# Altium PCB PCB_2020-08-04_13-41-21_2020-08-21_13-22-36.pcbdoc
Units mil, origin at the board's own origin, x right, y up, seen from the top; angles counter-clockwise.
Board outline 4947.01 x 4947.01 mil, 2 copper layers (Top Layer, Bottom Layer); 45 components, 87 nets, 336 pads, 43 vias.
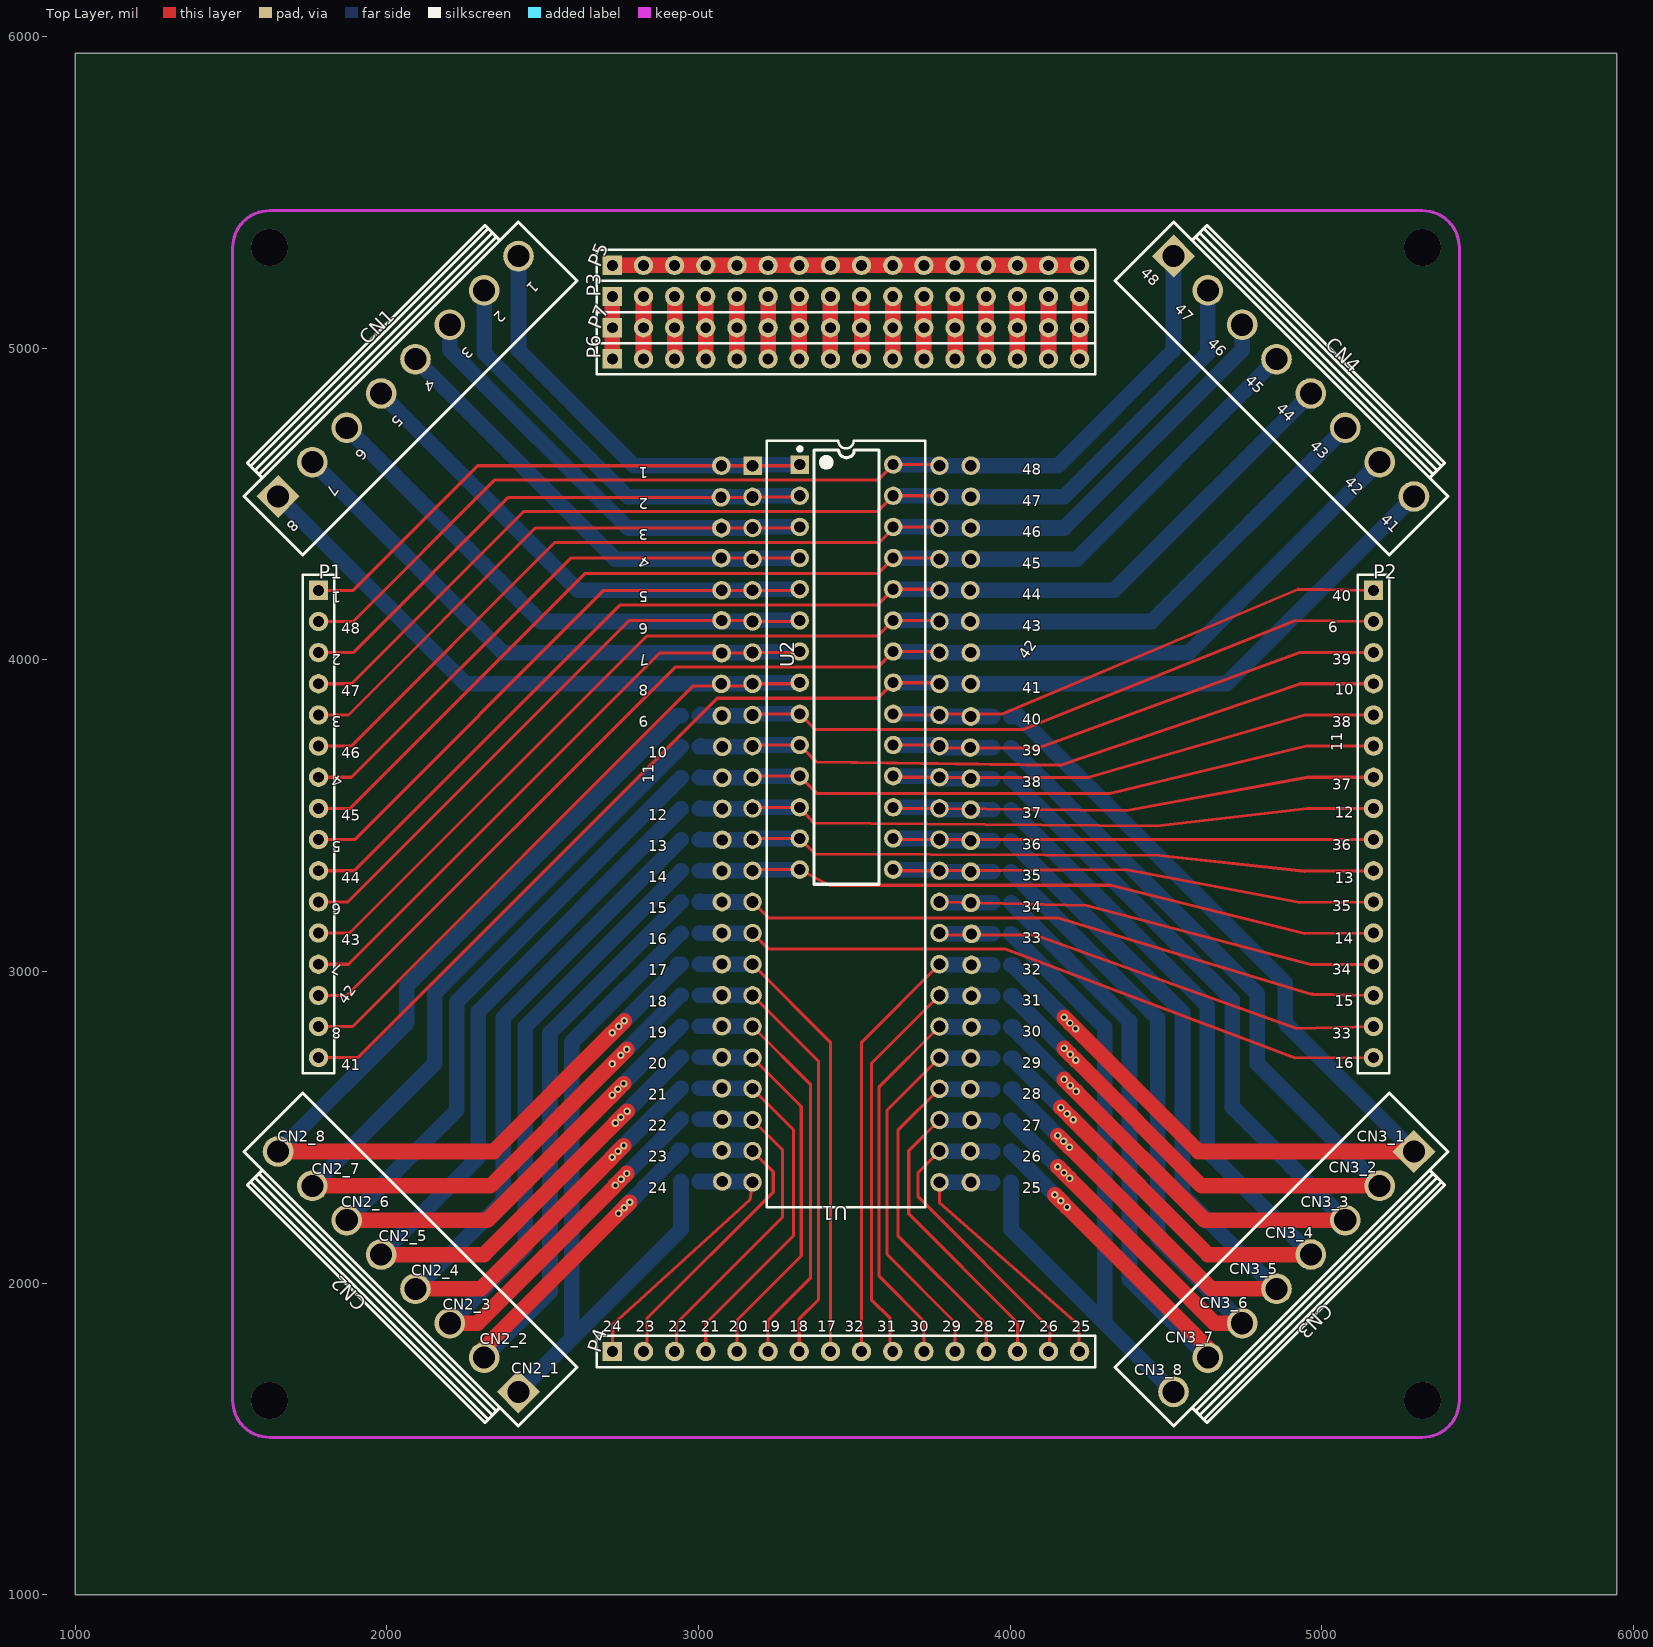
[diagram p0: Top Layer view]
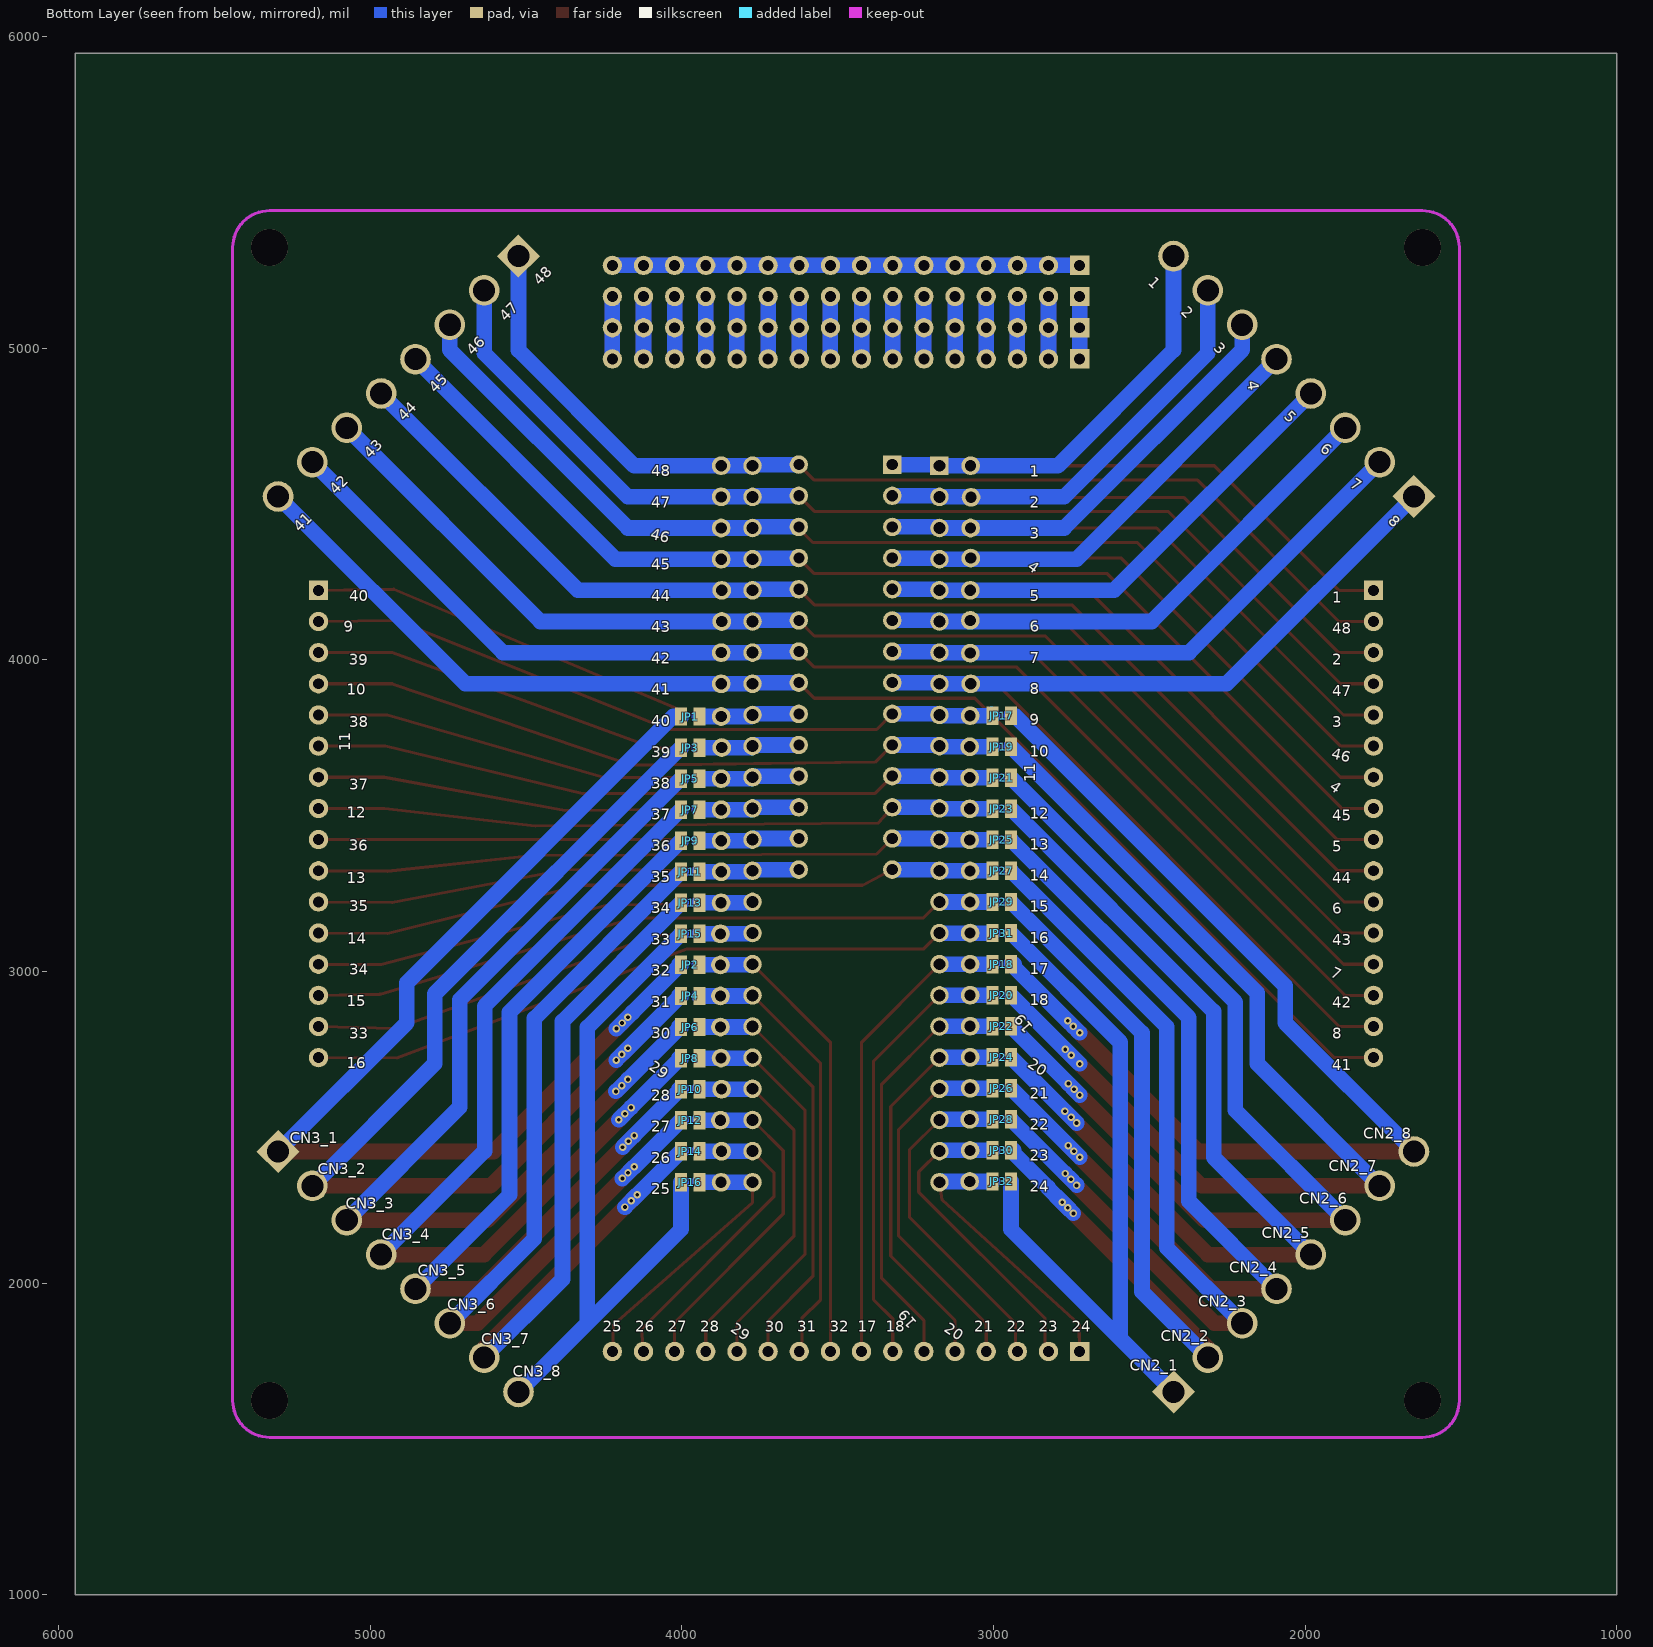
[diagram p1: Bottom Layer view, seen from below]

## Layer stack, top to bottom
Top Layer: signal copper (thickness not stored)
Dielectric: dielectric 12.6, FR-4, Dk 4.8
Bottom Layer: signal copper (thickness not stored)

## Board outline
5947.01,1000 1000,1000 1000,5947.01 5947.01,5947.01

## Components (designator, comment, footprint, x,y, rotation, side; value= is the part's Value field where it differs from the comment)
CN1 "B8P-VH (LF)(SN)" "CONN-TH_B8P-VH (LF)(SN)" 2036.5,4910.51 r45 top
CN2 "B8P-VH (LF)(SN)" "CONN-TH_B8P-VH (LF)(SN)" 2036.5,2036.5 r135 top
CN3 "B8P-VH (LF)(SN)" "CONN-TH_B8P-VH (LF)(SN)" 4910.51,2036.5 r225 top
CN4 "B8P-VH (LF)(SN)" "CONN-TH_B8P-VH (LF)(SN)" 4910.51,4910.51 r315 top
JP1 "Jumper pad" JUMPERPADS 3973.5,3818.5 r180 bottom
JP2 "Jumper pad" JUMPERPADS 3973.5,3021.17 r180 bottom
JP3 "Jumper pad" JUMPERPADS 3973.5,3718.84 r180 bottom
JP4 "Jumper pad" JUMPERPADS 3973.5,2921.5 r180 bottom
JP5 "Jumper pad" JUMPERPADS 3973.5,3619.17 r180 bottom
JP6 "Jumper pad" JUMPERPADS 3973.5,2821.84 r180 bottom
JP7 "Jumper pad" JUMPERPADS 3973.5,3519.5 r0 bottom
JP8 "Jumper pad" JUMPERPADS 3973.5,2722.17 r0 bottom
JP9 "Jumper pad" JUMPERPADS 3973.5,3419.84 r0 bottom
JP10 "Jumper pad" JUMPERPADS 3973.5,2622.5 r0 bottom
JP11 "Jumper pad" JUMPERPADS 3973.5,3320.17 r0 bottom
JP12 "Jumper pad" JUMPERPADS 3973.5,2522.84 r0 bottom
JP13 "Jumper pad" JUMPERPADS 3973.5,3220.5 r0 bottom
JP14 "Jumper pad" JUMPERPADS 3973.5,2423.17 r0 bottom
JP15 "Jumper pad" JUMPERPADS 3973.5,3120.84 r0 bottom
JP16 "Jumper pad" JUMPERPADS 3973.5,2323.5 r0 bottom
JP17 "Jumper pad" JUMPERPADS 2973.5,3821.17 r180 bottom
JP18 "Jumper pad" JUMPERPADS 2973.5,3023.84 r180 bottom
JP19 "Jumper pad" JUMPERPADS 2973.5,3721.5 r180 bottom
JP20 "Jumper pad" JUMPERPADS 2973.5,2924.17 r180 bottom
JP21 "Jumper pad" JUMPERPADS 2973.5,3621.84 r180 bottom
JP22 "Jumper pad" JUMPERPADS 2973.5,2824.5 r180 bottom
JP23 "Jumper pad" JUMPERPADS 2973.5,3522.17 r180 bottom
JP24 "Jumper pad" JUMPERPADS 2973.5,2724.84 r180 bottom
JP25 "Jumper pad" JUMPERPADS 2973.5,3422.5 r180 bottom
JP26 "Jumper pad" JUMPERPADS 2973.5,2625.17 r180 bottom
JP27 "Jumper pad" JUMPERPADS 2973.5,3322.84 r0 bottom
JP28 "Jumper pad" JUMPERPADS 2973.5,2525.5 r0 bottom
JP29 "Jumper pad" JUMPERPADS 2973.5,3223.17 r0 bottom
JP30 "Jumper pad" JUMPERPADS 2973.5,2425.84 r0 bottom
JP31 "Jumper pad" JUMPERPADS 2973.5,3123.5 r0 bottom
JP32 "Jumper pad" JUMPERPADS 2973.5,2326.17 r0 bottom
P1 "Header-Female-2.54_1x16" HDR-TH_16P-P2.54-V 1780.59,3473.5 r0 top
P2 "Header-Female-2.54_1x16" HDR-TH_16P-P2.54-V 5166.42,3473.5 r0 top
P3 "Header-Female-2.54_1x16" HDR-TH_16P-P2.54-V 3473.5,5166.42 r90 top
P4 "Header-Female-2.54_1x16" HDR-TH_16P-P2.54-V 3473.5,1780.59 r90 top
P5 "Header-Female-2.54_1x16" HDR-TH_16P-P2.54-V 3473.5,5266.42 r90 top
P6 "Header-Female-2.54_1x16" HDR-TH_16P-P2.54-V 3473.5,4966.42 r90 top
P7 "Header-Female-2.54_1x16" HDR-TH_16P-P2.54-V 3473.5,5066.42 r90 top
U1 "DIP48" DIP48 3473.5,3473.5 r180 top
U2 "DIP28" DIP-28_300MIL 3625,3327.01 r90 top

## Footprints (in the part's own frame and the unit in brackets; to place one, negate y for a bottom-side part, rotate by r counter-clockwise, add the part's x,y. Pads: shape width x height; smd on the part's side, far side on the other; paste and mask are expansions set on the pad)
"CONN-TH_B8P-VH (LF)(SN)" [mm]
  rect 2.5x2.5 hole 1.8: 1(-13.86,0)
  round 2.5 hole 1.8: 2(-9.9,0) 3(-5.94,0) 4(-1.98,0) 5(1.98,0) 6(5.94,0) 7(9.9,0) 8(13.86,0)
  silkscreen extent -15.81,-4.8 15.81,3.7
DIP48 [mil]
  rect 59.5x59.5 hole 38: 1(300,-1150)
  round 59.5 hole 38: 2(300,-1050) 3(300,-950) 4(300,-850) 5(300,-750) 6(300,-650) 7(300,-550) 8(300,-450) 9(300,-350) 10(300,-250) 11(300,-150) 12(300,-50) 13(300,50) 14(300,150) 15(300,250) 16(300,350) 17(300,450) 18(300,550) 19(300,650) 20(300,750) 21(300,850) 22(300,950) 23(300,1050) 24(300,1150) 25(-300,1150) 26(-300,1050) 27(-300,950) 28(-300,850) 29(-300,750) 30(-300,650) 31(-300,550) 32(-300,450) 33(-300,350) 34(-300,250) 35(-300,150) 36(-300,50) 37(-300,-50) 38(-300,-150) 39(-300,-250) 40(-300,-350) 41(-300,-450) 42(-300,-550) 43(-300,-650) 44(-300,-750) 45(-300,-850) 46(-300,-950) 47(-300,-1050) 48(-300,-1150)
  silkscreen extent -254,-1230 254,1230
DIP-28_300MIL [mm]
  rect 1.5x1.5 hole 0.9: 1(33.02,7.62)
  round 1.5 hole 0.9: 2(30.48,7.62) 3(27.94,7.62) 4(25.4,7.62) 5(22.86,7.62) 6(20.32,7.62) 7(17.78,7.62) 8(15.24,7.62) 9(12.7,7.62) 10(10.16,7.62) 11(7.62,7.62) 12(5.08,7.62) 13(2.54,7.62) 14(0,7.62) 15(0,0) 16(2.54,0) 17(5.08,0) 18(7.62,0) 19(10.16,0) 20(12.7,0) 21(15.24,0) 22(17.78,0) 23(20.32,0) 24(22.86,0) 25(25.4,0) 26(27.94,0) 27(30.48,0) 28(33.02,0)
  silkscreen extent -1.19,1.16 34.45,7.76
HDR-TH_16P-P2.54-V [mil]
  rect 62x62 hole 35: 1(0,750)
  round 62 hole 35: 2(0,650) 3(0,550) 4(0,450) 5(0,350) 6(0,250) 7(0,150) 8(0,50) 9(0,-50) 10(0,-150) 11(0,-250) 12(0,-350) 13(0,-450) 14(0,-550) 15(0,-650) 16(0,-750)
  silkscreen extent -50,-800 50,800
JUMPERPADS [mm]
  rect 1x1.5 smd: 1(0.75,0) 2(-0.75,0)

## Free pads (board coordinates)
  round 60 hole 36: 14(3072.14,4522.01) 15(3073.5,4623.51) 16(3073.48,4423.51) 17(3073.18,4327.01) 18(3074.46,4223.51) 19(3074.46,4127.01) 20(3074.46,4022.01) 21(3073.12,3923.51) 22(3075.15,3821.17) 23(3076.48,3721.51) 24(3076.48,3621.84) 25(3076.48,3522.17) 26(3076.48,3422.51) 27(3075.15,3322.84) 28(3075.15,3223.17) 29(3075.15,3123.51) 30(3075.15,3023.84) 31(3075.15,2924.17) 32(3075.15,2824.51) 33(3075.15,2724.84) 34(3075.15,2625.17) 35(3076.48,2525.51) 36(3075.15,2425.84) 37(3076.48,2326.17) 38(3874.23,4523.51) 39(3874.23,4423.51) 40(3874.23,4623.51) 41(3874.23,4323.51) 42(3872.38,4223.51) 43(3872.38,4123.51) 44(3874.23,4023.51) 45(3874.23,3923.51) 46(3874.23,3818.51) 47(3872.38,3718.84) 48(3874.23,3619.17) 49(3874.23,3519.51) 50(3874.23,3419.84) 51(3874.23,3320.17) 52(3874.53,3220.51) 53(3876.38,3120.84) 54(3876.38,3021.17) 55(3876.38,2921.51) 56(3876.38,2821.84) 57(3874.53,2722.17) 58(3872.68,2622.51) 59(3876.38,2522.84) 60(3872.68,2423.17) 61(3874.53,2323.51)
  round 118.11 hole 118.11 unplated: ""(1623.11,1623.11) ""(1623.11,5323.9) ""(5323.9,1623.11) ""(5323.9,5323.9)

## Via types
v1: diameter 24, hole 12, Top Layer to Bottom Layer, 43 vias

## Nets (pads, with @x,y where several pads share a name; then routed paths per layer and width w, separated by ;. In a path a pad name is that pad's centre, name@x,y a point inside that pad or via, vN(x,y) a via of type N, cw(c..) or ccw(c..) an arc to the next point about the centre after c; other vN are vias at no path point)
CN2_1: CN2.1 JP31.2 JP32.2 | length 2580.5
  Bottom Layer w50: JP32.2 2943.97,2172.27 2422.35,1650.65 2593.5,1821.8 2593.5,2773.01 JP31.2
CN2_2: CN2.2 JP29.2 JP30.2 | length 2709.9
  Top Layer w50: CN2.2 2312.1,1792.11 v1(2743.5,2223.51) v1(2779.62,2259.63)
  Bottom Layer w50: CN2.2 2523.5,1972.3 2523.5,2802.71 JP29.2 ; v1(2743.5,2223.51) v1(2761.87,2241.88) v1(2779.62,2259.63) 2825,2305.01 2825,2306.87 JP30.2 JP30.2@2935.84,2425.84
CN2_3: CN2.3 JP27.2 JP28.2 | length 2826.6
  Top Layer w50: CN2.3 2291.13,1871.14 v1(2733.5,2313.51) 2733.5,2315.04 v1(2770.2,2351.74)
  Bottom Layer w50: CN2.3@2201.85,1871.14 2443.5,2112.79 2443.5,2822.41 JP27.2 ; v1(2733.5,2313.51) 2733.5,2315.04 v1(2751.7,2333.24) v1(2770.2,2351.74) JP28.2
CN2_4: CN2.4 JP25.1 JP26.1 | length 2966.9
  Top Layer w50: CN2.4 2301.37,1981.38 v1(2723.5,2403.51) 2723.5,2404.7 v1(2760.12,2441.32)
  Bottom Layer w50: CN2.4 2373.5,2263.26 2373.5,2852.01 JP25.1 ; v1(2723.5,2403.51) 2723.5,2404.7 v1(2741.87,2423.07) v1(2760.12,2441.32) JP26.1
CN2_5: CN2.5 JP23.1 JP24.1 | length 3107.4
  Top Layer w50: CN2.5 2311.61,2091.62 v1(2733.5,2513.51) ; v1(2733.5,2514.37) v1(2770.78,2551.65)
  Bottom Layer w50: CN2.5 2293.5,2403.74 2293.5,2871.71 JP23.1 ; v1(2733.5,2513.51) v1(2733.5,2514.37) 2751.28,2532.15 v1(2770.78,2551.65) JP24.1
  other v1: 2751.28,2532.15
CN2_6: CN2.6 JP21.1 JP22.1 | length 3247
  Top Layer w50: CN2.6 2321.85,2201.86 v1(2723.5,2603.51) v1(2759.7,2640.24)
  Bottom Layer w50: CN2.6 2223.5,2554.23 2223.5,2901.41 JP21.1 ; v1(2723.5,2603.51) 2723.5,2604.04 v1(2741.45,2621.99) v1(2759.7,2640.24) JP22.1
CN2_7: CN2.7 JP19.1 JP20.1 | length 3402
  Top Layer w50: CN2.7 2332.09,2312.1 v1(2723.5,2703.51) v1(2769.87,2750.07)
  Bottom Layer w50: CN2.7 2153.5,2704.71 2153.5,2931.01 JP19.1 ; v1(2723.5,2703.51) 2723.5,2703.7 v1(2750.87,2731.07) v1(2769.87,2750.07) JP20.1
CN2_8: CN2.8 JP17.1 JP18.1 | length 3548.7
  Top Layer w50: CN2.8 2342.34,2422.34 v1(2723.5,2803.51) v1(2761.78,2841.65)
  Bottom Layer w50: CN2.8 2063.5,2835.19 2063.5,2953.5 2931.17,3821.17 JP17.1 ; v1(2723.5,2803.51) 2723.64,2803.51 2743.78,2823.65 2761.78,2841.65 JP18.1 JP18.1@2933.84,3023.84
  other v1: 2743.78,2823.65
CN3_1: CN3.1 JP1.2 JP2.2 | length 3599.9
  Top Layer w50: v1(4173.5,2853.51) v1(4192.24,2834.77) v1(4210.24,2816.77) 4604.66,2422.35 CN3.1
  Bottom Layer w50: JP1.2 4028.5,3818.51 ; JP1.2 4028.5,3818.5 ; JP2.2@4010.84,3021.17 JP2.2 4005.84,3021.17 v1(4173.5,2853.51) ; 4154.75,2872.26 v1(4173.5,2853.51) ; v1(4210.24,2816.77) v1(4173.5,2853.51) ; CN3.1 4883.5,2835.2 4883.5,2963.5 4028.5,3818.5
CN3_2: CN3.2 JP3.2 JP4.2 | length 3393.1
  Top Layer w50: v1(4173.5,2753.51) 4192.96,2734.05 v1(4211.21,2715.8) 4614.91,2312.1 CN3.2
  Bottom Layer w50: JP3.2 4793.5,2928.41 4793.5,2704.71 CN3.2 ; JP4.2@4010.51,2921.5 JP4.2 4005.5,2921.51 v1(4173.5,2753.51) v1(4211.21,2715.8)
  other v1: 4192.96,2734.05
CN3_3: CN3.3 JP5.2 JP6.2 | length 3252.9
  Top Layer w50: v1(4173.5,2653.51) 4192.96,2634.05 4211.96,2615.05 4625.16,2201.85 CN3.3@5075.87,2201.85
  Bottom Layer w50: JP5.2 4713.5,2908.71 4713.5,2564.22 CN3.3@5075.87,2201.85 ; JP6.2@4010.17,2821.84 JP6.2 4005.17,2821.84 v1(4173.5,2653.51) v1@4211.96,2615.05
  other v1: 4211.96,2615.05 4192.96,2634.05
CN3_4: CN3.4 JP7.1 JP8.1 | length 3112.7
  Top Layer w50: v1(4163.5,2563.51) v1(4183.21,2543.8) v1(4202.71,2524.3) 4635.39,2091.62 CN3.4
  Bottom Layer w50: JP7.1 4633.5,2889.01 4633.5,2423.75 CN3.4 ; JP8.1@4009.84,2722.17 JP8.1 4004.84,2722.17 v1(4163.5,2563.51) v1(4202.71,2524.3)
CN3_5: CN3.5 JP9.1 JP10.1 | length 2968.5
  Top Layer w50: v1(4153.5,2473.51) v1(4171.71,2455.3) v1(4190.71,2436.3) 4645.63,1981.38 CN3.5
  Bottom Layer w50: JP9.1 4553.5,2869.41 4553.5,2283.27 CN3.5 ; JP10.1@4009.51,2622.5 JP10.1 4004.5,2622.51 v1(4153.5,2473.51) v1(4190.71,2436.3)
CN3_6: CN3.6 JP11.1 JP12.1 | length 2821.9
  Top Layer w50: v1(4153.5,2373.51) v1(4173.21,2353.8) v1(4191.21,2335.8) 4655.88,1871.13 CN3.6@4745.15,1871.13
  Bottom Layer w50: JP11.1 4473.5,2849.71 4473.5,2142.78 CN3.6@4745.15,1871.13 ; JP12.1 4152.36,2373.51 v1(4153.5,2373.51) v1(4191.21,2335.8)
CN3_7: CN3.7 JP13.1 JP14.1 | length 2701.6
  Top Layer w50: v1(4143.5,2283.51) 4162.96,2264.05 4182.96,2244.05 4634.91,1792.1 CN3.7
  Bottom Layer w50: JP13.1 4383.5,2840.01 4383.5,2012.31 CN3.7 ; JP14.1 4142.69,2283.51 v1(4143.5,2283.51) v1@4182.96,2244.05
  other v1: 4182.96,2244.05 4162.96,2264.05
CN3_8: CN3.8 JP15.1 JP16.1 | length 2575.3
  Bottom Layer w50: JP16.1 4003,2172.31 CN3.8 ; JP15.1 4303.5,2820.41 4303.5,1871.82 CN3.8
L1: CN1.8 P1.1 pad.15 U1.1 U2.1 | length 3071.1
  Top Layer w10: P1.1 1891.5,4223.51 2291.5,4623.51 pad.15 U1.1 3321.5,4623.5 U2.1
  Bottom Layer w50: CN1.8 2422.3,4994.71 2793.5,4623.51 U1.1 3177,4627.01 U2.1
L2: CN1.7 P1.3 pad.14 U1.2 U2.2 | length 3159.6
  Top Layer w10: P1.3 1891.5,4023.51 2390,4522.01 pad.14 3172,4522.01 U1.2 3321.5,4523.5 U2.2
  Bottom Layer w50: CN1.7 2312.1,4984.91 2773.5,4523.51 U1.2 3177,4527.01 U2.2
L3: CN1.6 P1.5 pad.16 U1.3 U2.3 | length 3236.5
  Top Layer w10: P1.5 1876.5,3823.51 2476.5,4423.51 pad.16 U1.3 3321.5,4423.51 U2.3
  Bottom Layer w50: CN1.6 2201.9,4995.11 2773.5,4423.51 U1.3 3177,4427.01 U2.3
L4: CN1.5 P1.7 pad.17 U1.4 U2.4 | length 3341.6
  Top Layer w10: P1.7 1886.5,3623.5 2590,4327.01 U1.4@3170,4327.01 ; U1.4 U1.4@3170,4327.01 ; U2.4 U1.4@3170,4327.01
  Bottom Layer w50: CN1.5 2733.74,4323.51 U1.4 3177,4327.01 U2.4
L5: CN1.4 P1.9 pad.18 U1.5 U2.5 | length 3484
  Top Layer w10: P1.9 1896.5,3423.51 2696.5,4223.51 pad.18 U1.5 3321.5,4223.5 U2.5
  Bottom Layer w50: CN1.4 2613.26,4223.51 U1.5 3177,4227.01 U2.5
L6: CN1.3 P1.11 pad.19 U1.6 U2.6 | length 3634.3
  Top Layer w10: P1.11 1875,3223.51 2778.5,4127.01 3170,4127.01 U1.6 3321.5,4123.5 U2.6
  Bottom Layer w50: CN1.3 2492.79,4123.51 U1.6 3177,4127.01 U2.6
L7: CN1.2 P1.13 pad.20 U1.7 U2.7 | length 3778.9
  Top Layer w10: P1.13 1876.5,3023.51 2875,4022.01 3172,4022.01 U1.7 3321.5,4023.5 U2.7
  Bottom Layer w50: CN1.2 2372.29,4023.51 U1.7 3177,4027.01 U2.7
L8: CN1.1 P1.15 pad.21 U1.8 U2.8 | length 3926.3
  Top Layer w10: P1.15 1890,2823.51 2983.5,3917.01 3167,3917.01 U1.8 3321.5,3923.5 U2.8
  Bottom Layer w50: CN1.1 2251.81,3923.51 pad.21 U1.8 3177,3927.01 U2.8
L9: JP17.2 P2.2 pad.22 U1.9 U2.9 | length 2412.5
  Top Layer w10: U1.9 3177.01,3827.01 U2.9 3375,3777.01 4042.5,3777.01 4915,4127.01 P2.2
  Bottom Layer w50: JP17.2@3006.87,3825 JP17.2 pad.22 3171.16,3821.17 U1.9 3177,3827.01 U2.9
L10: JP19.2 P2.4 pad.23 U1.10 U2.10 | length 2389.6
  Top Layer w10: U1.10 3177.01,3727.01 U2.10 3380,3672.01 4160,3662.01 4930,3923.5 P2.4
  Bottom Layer w50: JP19.2@3006.54,3725 JP19.2 pad.23 3171.5,3721.51 U1.10 3177,3727.01 U2.10
L11: JP21.2 P2.6 pad.24 U1.11 U2.11 | length 2363.6
  Top Layer w10: U1.11 3177.01,3627.01 U2.11 3380,3572.01 4320,3572.01 4951.5,3723.51 P2.6
  Bottom Layer w50: JP21.2@3006.2,3625 JP21.2 pad.24 3171.83,3621.84 U1.11 3177,3627.01 U2.11
L12: JP23.2 P2.8 pad.25 U1.12 U2.12 | length 2347.9
  Top Layer w10: U1.12 3177.01,3527.01 U2.12 3370,3477.01 4470,3467.01 4955,3523.5 P2.8
  Bottom Layer w50: JP23.2@3005.87,3525 JP23.2 pad.25 3172.16,3522.17 U1.12 3177,3527.01 U2.12
L13: JP25.2 P2.10 pad.26 U1.13 U2.13 | length 2345.1
  Top Layer w10: U1.13 3177.01,3427.01 U2.13 3375,3377.01 4480,3372.01 4945,3322.01 P2.10
  Bottom Layer w50: JP25.2@3005.53,3425 JP25.2 pad.26 3172.5,3422.51 U1.13 3177,3427.01 U2.13
L14: JP27.1 P2.12 pad.27 U1.14 U2.14 | length 2352.4
  Top Layer w10: U1.14 3177.01,3327.01 U2.14 3420,3277.01 4320,3277.01 4945,3122.01 P2.12
  Bottom Layer w50: JP27.1@3005.2,3325 JP27.1 pad.27 3172.83,3322.84 U1.14 3177,3327.01 U2.14
L15: JP29.1 P2.14 pad.28 U1.15 | length 2223.5
  Top Layer w10: U1.15 3225,3172.01 4155,3172.01 4970,2927.01 P2.14
  Bottom Layer w50: JP29.1@3004.87,3225 JP29.1 pad.28 3173.16,3223.17 U1.15
L16: JP31.1 P2.16 pad.29 U1.16 | length 2250.5
  Top Layer w10: U1.16 3225,3072.01 3985,3072.01 4915,2722.01 P2.16
  Bottom Layer w50: JP31.1@3004.53,3125 JP31.1 pad.29 U1.16
L17: JP18.2 P4.8 pad.30 U1.17 | length 1518.7
  Top Layer w10: U1.17 3423.5,2773.5 P4.8
  Bottom Layer w50: JP18.2@3004.2,3025 JP18.2 pad.30 3173.17,3023.84 U1.17
L18: JP20.2 P4.7 pad.31 U1.18 | length 1426.7
  Top Layer w10: U1.18 3385,2712.01 3385,1947.01 3323.5,1885.51 P4.7
  Bottom Layer w50: JP20.2 pad.31 3172.84,2924.17 U1.18
L19: JP22.2 P4.6 pad.32 U1.19 | length 1347.6
  Top Layer w10: U1.19 3360,2637.01 3360,2017.01 3223.5,1880.51 P4.6
  Bottom Layer w50: JP22.2 pad.32 3172.5,2824.51 U1.19
L20: JP24.2 P4.5 pad.33 U1.20 | length 1264.3
  Top Layer w10: P4.5 3123.5,1880.51 3330,2087.01 3330,2567.01 U1.20
  Bottom Layer w50: JP24.2 pad.33 3172.17,2724.84 U1.20
L21: JP26.2 P4.4 pad.34 U1.21 | length 1185.1
  Top Layer w10: P4.4 3023.5,1870.51 3305,2152.01 3305,2492.01 U1.21
  Bottom Layer w50: JP26.2 pad.34 3171.84,2625.17 U1.21
L22: JP28.1 P4.3 pad.35 U1.22 | length 1097.7
  Top Layer w10: P4.3 2930,1787.11 2930,1872.01 3270,2212.01 3270,2427.01 U1.22
  Bottom Layer w50: JP28.1 pad.35 3171.5,2525.51 U1.22
L23: JP30.1 P4.2 pad.36 U1.23 | length 1014.4
  Top Layer w10: P4.2 2835,1792.11 2835,1887.01 3240,2292.01 3240,2357.01 U1.23
  Bottom Layer w50: JP30.1 pad.36 3171.17,2425.84 U1.23
L24: JP32.1 P4.1 pad.37 U1.24 | length 911.4
  Top Layer w10: P4.1 2725,1867.01 3165,2267.01 U1.24
  Bottom Layer w50: JP32.1@3004.2,2325 JP32.1 pad.37 3170.84,2326.17 U1.24
L25: JP16.2 P4.16 pad.61 U1.25 | length 920.7
  Top Layer w10: U1.25 3773.5,2258.51 4220,1867.01 P4.16
  Bottom Layer w50: U1.25 pad.61 JP16.2 JP16.2@3940.47,2320
L26: JP14.2 P4.15 pad.60 U1.26 | length 1022.7
  Top Layer w10: U1.26 3705,2355 3705,2277.01 4130,1852.01 P4.15
  Bottom Layer w50: U1.26 3773.84,2423.17 pad.60 JP14.2 JP14.2@3940.81,2420
L27: JP12.2 P4.14 pad.59 U1.27 | length 1102.8
  Top Layer w10: U1.27 3675,2425 3675,2222.01 4023.5,1873.51 P4.14
  Bottom Layer w50: U1.27 3774.17,2522.84 pad.59 JP12.2 JP12.2@3941.14,2520
L28: JP10.2 P4.13 pad.58 U1.28 | length 1190
  Top Layer w10: U1.28 3640,2490 3640,2152.01 3923.5,1868.51 P4.13
  Bottom Layer w50: U1.28 3774.5,2622.51 pad.58 JP10.2 JP10.2@3941.47,2620
L29: JP8.2 P4.12 pad.57 U1.29 | length 1277.3
  Top Layer w10: U1.29 3605,2555 3605,2092.01 3823.5,1873.51 P4.12
  Bottom Layer w50: U1.29 3774.84,2722.17 pad.57 JP8.2 JP8.2@3941.8,2720
L30: JP6.1 P4.11 pad.56 U1.30 | length 1356.2
  Top Layer w10: P4.11 3723.5,1878.51 3580,2022.01 3580,2630 U1.30
  Bottom Layer w50: U1.30 3775.17,2821.84 pad.56 JP6.1 JP6.1@3942.14,2820
L31: JP4.1 P4.10 pad.55 U1.31 | length 1435.2
  Top Layer w10: P4.10 3615,1789.1 3615,1887.01 3555,1947.01 3555,2705 U1.31
  Bottom Layer w50: U1.31 3775.5,2921.51 pad.55 JP4.1 JP4.1@3942.47,2920
L32: JP2.1 P4.9 pad.54 U1.32 | length 1519.6
  Top Layer w10: P4.9 3523.5,2773.5 U1.32
  Bottom Layer w50: U1.32 3775.84,3021.17 pad.54 JP2.1 JP2.1@3942.81,3020
L33: JP15.2 P2.15 pad.53 U1.33 | length 1619.2
  Top Layer w10: U1.33 3780,3117.01 4080,3117.01 4920,2817.01 P2.15
  Bottom Layer w50: U1.33 3776.17,3120.84 pad.53 JP15.2
L34: JP13.2 P2.13 pad.52 U1.34 | length 1589.4
  Top Layer w10: U1.34 4245,3212.01 4965,3022.01 P2.13
  Bottom Layer w50: U1.34 3776.5,3220.51 pad.52 JP13.2
L35: JP11.2 P2.11 pad.51 U1.35 U2.15 | length 1874.4
  Top Layer w10: U2.15 3628.5,3323.5 U1.35 4370,3327.01 4930,3222.01 P2.11
  Bottom Layer w50: U2.15 3770,3327.01 U1.35 3776.84,3320.17 pad.51 JP11.2
L36: JP9.2 P2.9 pad.50 U1.36 U2.16 | length 1864.8
  Top Layer w10: U2.16 3628.5,3423.5 U1.36 P2.9
  Bottom Layer w50: U2.16 3770,3427.01 U1.36 3777.17,3419.84 pad.50 JP9.2
L37: JP7.2 P2.7 pad.49 U1.37 U2.17 | length 1874.7
  Top Layer w10: U2.17 3628.5,3523.5 U1.37 4375,3517.01 4955,3623.5 P2.7
  Bottom Layer w50: U2.17 3770,3527.01 U1.37 3777.5,3519.51 pad.49 JP7.2
L38: JP5.1 P2.5 pad.48 U1.38 U2.18 | length 1893.7
  Top Layer w10: U2.18 3628.5,3623.5 U1.38 4250,3622.01 4945,3823.5 P2.5
  Bottom Layer w50: U2.18 3770,3627.01 U1.38 3777.84,3619.17 pad.48 JP5.1
L39: JP3.1 P2.3 pad.47 U1.39 U2.19 | length 1929.6
  Top Layer w10: U2.19 U1.39@3777.01,3727.01 ; U1.39 3773.5,3717.01 4090,3717.01 4930,4023.51 P2.3
  Bottom Layer w50: U2.19 3770,3727.01 U1.39 3778.17,3718.84 pad.47 JP3.1 JP3.1@3942.81,3720
L40: JP1.1 P2.1 pad.46 U1.40 U2.20 | length 1949.7
  Top Layer w10: U2.20 3628.5,3823.5 U1.40 3777.01,3827.01 3975,3827.01 4925,4227.01 P2.1
  Bottom Layer w50: U2.20 3770,3827.01 U1.40 3778.5,3818.51 pad.46 JP1.1 JP1.1@3942.47,3820
L41: CN4.8 P1.16 pad.45 U1.41 U2.21 | length 4414.7
  Top Layer w10: P1.16 1906.5,2723.51 3060,3877.01 3575,3877.01 U2.21 3770,3927.01 U1.41
  Bottom Layer w50: U2.21 3770,3927.01 U1.41 pad.45 4695.2,3923.51 CN4.8
L42: CN4.7 P1.14 pad.44 U1.42 U2.22 | length 4269.3
  Top Layer w10: P1.14 1875,2923.51 1875,2927.01 2925,3977.01 3575,3977.01 U2.22 3770,4027.01 U1.42
  Bottom Layer w50: U2.22 3770,4027.01 U1.42 pad.44 4574.71,4023.51 CN4.7
L43: CN4.6 P1.12 pad.43 U1.43 U2.23 | length 4119.8
  Top Layer w10: P1.12 1880,3123.51 2833.5,4077.01 3575,4077.01 U2.23 3770,4127.01 U1.43
  Bottom Layer w50: U2.23 3770,4127.01 U1.43 pad.43 4454.24,4123.51 CN4.6
L44: CN4.5 P1.10 pad.42 U1.44 U2.24 | length 3972.4
  Top Layer w10: P1.10 1895,3323.51 2748.5,4177.01 3575,4177.01 U2.24 3770,4227.01 U1.44
  Bottom Layer w50: U2.24 3770,4227.01 U1.44 pad.42 4333.75,4223.51 CN4.5
L45: CN4.4 P1.8 pad.41 U1.45 U2.25 | length 3827
  Top Layer w10: P1.8 1885,3523.51 1885,3527.01 2635,4277.01 3575,4277.01 U2.25 3770,4327.01 U1.45
  Bottom Layer w50: U2.25 3770,4327.01 U1.45 pad.41 4213.27,4323.51 CN4.4
L46: CN4.3 P1.6 pad.39 U1.46 U2.26 | length 3727.9
  Top Layer w10: P1.6 1885,3723.51 2538.5,4377.01 3580,4377.01 3625,4422.01 U2.26 3770,4427.01 U1.46
  Bottom Layer w50: U2.26 3770,4427.01 U1.46 pad.39 ; pad.39 4173.5,4423.51 4745.2,4995.21 CN4.3
L47: CN4.2 P1.4 pad.38 U1.47 U2.27 | length 3648
  Top Layer w10: P1.4 1886.5,3923.51 2440,4477.01 3575,4477.01 U2.27 3770,4527.01 U1.47
  Bottom Layer w50: U2.27 3770,4527.01 U1.47 pad.38 ; pad.38 4173.5,4523.51 4634.9,4984.91 CN4.2
L48: CN4.1 P1.2 pad.40 U1.48 U2.28 | length 3561.9
  Top Layer w10: P1.2@1782.09,4122.01 cw(c1782.09,4123.5) P1.2 1891.5,4123.51 2345,4577.01 3575,4577.01 U2.28 3770,4627.01 U1.48
  Bottom Layer w50: U2.28 3770,4627.01 U1.48 pad.40 ; pad.40 4153.5,4623.51 4524.7,4994.71 CN4.1
P3_1: P3.1 P6.1 P7.1 | length 400
  Top Layer w50: P6.1 P3.1
  Bottom Layer w50: P6.1 P7.1 P3.1
P3_2: P3.2 P6.2 P7.2 | length 400
  Top Layer w50: P6.2 P3.2
  Bottom Layer w50: P6.2 P7.2 P3.2
P3_3: P3.3 P6.3 P7.3 | length 400
  Top Layer w50: P6.3 P3.3
  Bottom Layer w50: P6.3 P7.3 P3.3
P3_4: P3.4 P6.4 P7.4 | length 400
  Top Layer w50: P6.4 P3.4
  Bottom Layer w50: P6.4 P7.4 P3.4
P3_5: P3.5 P6.5 P7.5 | length 400
  Top Layer w50: P6.5 P3.5
  Bottom Layer w50: P6.5 P7.5 P3.5
P3_6: P3.6 P6.6 P7.6 | length 400
  Top Layer w50: P6.6 P3.6
  Bottom Layer w50: P6.6 P7.6 P3.6
P3_7: P3.7 P6.7 P7.7 | length 400
  Top Layer w50: P6.7 P3.7
  Bottom Layer w50: P6.7 P7.7 P3.7
P3_8: P3.8 P6.8 P7.8 | length 400
  Top Layer w50: P6.8 P3.8
  Bottom Layer w50: P6.8 P7.8 P3.8
P3_9: P3.9 P6.9 P7.9 | length 400
  Top Layer w50: P6.9 P3.9
  Bottom Layer w50: P6.9 P7.9 P3.9
P3_10: P3.10 P6.10 P7.10 | length 400
  Top Layer w50: P6.10 P3.10
  Bottom Layer w50: P6.10 P7.10 P3.10
P3_11: P3.11 P6.11 P7.11 | length 400
  Top Layer w50: P6.11 P3.11
  Bottom Layer w50: P6.11 P7.11 P3.11
P3_12: P3.12 P6.12 P7.12 | length 400
  Top Layer w50: P6.12 P3.12
  Bottom Layer w50: P6.12 P7.12 P3.12
P3_13: P3.13 P6.13 P7.13 | length 400
  Top Layer w50: P6.13 P3.13
  Bottom Layer w50: P6.13 P7.13 P3.13
P3_14: P3.14 P6.14 P7.14 | length 400
  Top Layer w50: P6.14 P3.14
  Bottom Layer w50: P6.14 P3.14
P3_15: P3.15 P6.15 P7.15 | length 400
  Top Layer w50: P6.15 P3.15
  Bottom Layer w50: P6.15 P3.15
P3_16: P3.16 P6.16 P7.16 | length 400
  Top Layer w50: P6.16 P3.16
  Bottom Layer w50: P6.16 P3.16
P5_1: P5.1 P5.2 P5.3 P5.4 P5.5 P5.6 P5.7 P5.8 P5.9 P5.10 P5.11 P5.12 P5.13 P5.14 P5.15 P5.16 | length 3000
  Top Layer w50: P5.1 P5.2 P5.16
  Bottom Layer w50: P5.1 P5.2 P5.3 P5.4 P5.5 P5.6 P5.7 P5.8 P5.9 P5.10 P5.11 P5.12 P5.13 P5.14 P5.15 P5.16
S$26: 
S$28: 
S$30: 
S$32: 
S$34: 
S$37: 

## Keep-outs
Keep-Out Layer:
  lines w10: 1505,1623.11 ccw(c1623.11,1623.11) 1623.11,1505 ; 1505,5323.9 cw(c1623.11,5323.9) 1623.11,5442.01 ; 5323.9,1505 ccw(c5323.9,1623.11) 5442.01,1623.11 ; 5323.9,5442.01 cw(c5323.9,5323.9) 5442.01,5323.9

## Silkscreen, mask and mechanical layers (free items; w line width, h text height)
Top Overlay:
  text "48" at 4416.13,5239.04 h35 r315
  text "1" at 2466.13,5218.79 h35 r225
  text "2" at 2361.13,5123.79 h35 r225
  text "47" at 4526.13,5124.04 h35 r315
  text "46" at 4631.13,5014.04 h35 r315
  text "3" at 2256.13,5008.79 h35 r225
  text "4" at 2150.76,4898.7 h35 r189
  text "45" at 4751.13,4894.04 h35 r315
  text "44" at 4851.13,4804.04 h35 r315
  text "5" at 2031.13,4788.79 h35 r225
  text "43" at 4961.13,4684.04 h35 r315
  text "6" at 1915.09,4682.67 h35 r230
  text "1" at 2838.5,4618.92 h35 r180
  text "48" at 4038.5,4593.92 h35
  text "42" at 5071.13,4569.04 h35 r315
  text "7" at 1818.99,4566.2 h35 r236
  text "2" at 2838.5,4519.14 h35 r180
  text "47" at 4038.5,4493.7 h35
  text "8" at 1696.13,4453.79 h35 r225
  text "41" at 5186.13,4449.04 h35 r315
  text "3" at 2838.5,4419.35 h35 r180
  text "46" at 4038.5,4393.48 h35
  text "4" at 2848.79,4316.23 h35 r144
  text "45" at 4038.5,4293.27 h35
  text "5" at 2838.5,4219.79 h35 r180
  text "1" at 1853.5,4218.92 h35 r180
  text "44" at 4038.5,4193.05 h35
  text "40" at 5033.5,4188.92 h35
  text "9" at 5049.92,4123.85 h35 r185
  text "6" at 2836.97,4119.94 h35 r185
  text "43" at 4038.5,4092.83 h35
  text "48" at 1853.5,4083.92 h35
  text "7" at 2835.16,4019.9 h35 r191
  text "2" at 1853.5,4018.92 h35 r180
  text "42" at 4052.66,3999.83 h35 r54
  text "39" at 5034.3,3983.92 h35
  text "8" at 2838.5,3920.44 h35 r180
  text "41" at 4038.5,3892.4 h35
  text "10" at 5041.45,3888.92 h35
  text "47" at 1853.5,3883.92 h35
  text "9" at 2836.97,3820.59 h35 r185
  text "3" at 1853.5,3818.92 h35 r180
  text "40" at 4038.5,3792.18 h35
  text "38" at 5034.3,3783.92 h35
  text "11" at 5066.1,3706.42 h35 r90
  text "39" at 4038.5,3691.96 h35
  text "10" at 2838.5,3685.88 h35
  text "46" at 1853.5,3683.92 h35
  text "4" at 1863.79,3615.58 h35 r144
  text "11" at 2856,3603.59 h35 r90
  text "38" at 4038.5,3591.75 h35
  text "37" at 5034.3,3583.92 h35
  text "12" at 5041.45,3493.92 h35
  text "37" at 4038.5,3491.53 h35
  text "12" at 2838.5,3486.31 h35
  text "45" at 1853.5,3483.92 h35
  text "5" at 1853.5,3418.92 h35 r180
  text "36" at 4038.5,3391.31 h35
  text "36" at 5034.3,3388.92 h35
  text "13" at 2838.5,3386.53 h35
  text "35" at 4038.5,3291.09 h35
  text "14" at 2838.5,3286.75 h35
  text "44" at 1853.5,3283.92 h35
  text "13" at 5041.45,3283.92 h35
  text "6" at 1851.97,3218.85 h35 r185
  text "35" at 5034.3,3193.92 h35
  text "34" at 4038.5,3190.88 h35
  text "15" at 2838.5,3186.96 h35
  text "33" at 4038.5,3090.66 h35
  text "14" at 5040.65,3088.92 h35
  text "16" at 2838.5,3087.18 h35
  text "43" at 1853.5,3083.92 h35
  text "7" at 1860.9,3017.28 h35 r155
  text "32" at 4038.5,2990.44 h35
  text "34" at 5033.5,2988.92 h35
  text "17" at 2838.5,2987.4 h35
  text "42" at 1867.66,2891.13 h35 r54
  text "31" at 4038.5,2890.22 h35
  text "15" at 5041.45,2888.92 h35
  text "18" at 2838.5,2887.62 h35
  text "8" at 1853.5,2818.92 h35 r180
  text "30" at 4038.5,2790.01 h35
  text "19" at 2838.5,2787.83 h35
  text "33" at 5034.3,2783.92 h35
  text "29" at 4038.5,2689.79 h35
  text "16" at 5042.25,2688.92 h35
  text "20" at 2838.5,2688.05 h35
  text "41" at 1853.5,2683.92 h35
  text "28" at 4038.5,2589.57 h35
  text "21" at 2838.5,2588.27 h35
  text "27" at 4038.5,2489.35 h35
  text "22" at 2838.5,2488.48 h35
  text "CN2_8" at 1648.5,2453.92 h35
  text "CN3_1" at 5113.5,2453.92 h35
  text "23" at 2838.5,2388.7 h35
  text "26" at 4038.5,2389.14 h35
  text "CN3_2" at 5023.5,2353.92 h35
  text "CN2_7" at 1758.5,2348.92 h35
  text "24" at 2838.5,2288.92 h35
  text "25" at 4038.5,2288.92 h35
  text "CN2_6" at 1853.5,2243.92 h35
  text "CN3_3" at 4933.5,2243.92 h35
  text "CN3_4" at 4818.5,2143.92 h35
  text "CN2_5" at 1973.5,2133.92 h35
  text "CN3_5" at 4703.5,2028.92 h35
  text "CN2_4" at 2078.5,2023.92 h35
  text "CN3_6" at 4608.5,1918.92 h35
  text "CN2_3" at 2178.5,1913.92 h35
  text "24" at 2693.5,1843.92 h35
  text "23" at 2799.14,1843.92 h35
  text "22" at 2903.18,1843.92 h35
  text "21" at 3007.22,1843.92 h35
  text "20" at 3096.96,1843.92 h35
  text "19" at 3201,1843.92 h35
  text "18" at 3290.74,1843.92 h35
  text "17" at 3380.48,1843.92 h35
  text "32" at 3470.22,1843.92 h35
  text "31" at 3574.26,1843.92 h35
  text "30" at 3678.3,1843.92 h35
  text "29" at 3782.34,1843.92 h35
  text "28" at 3886.38,1843.92 h35
  text "27" at 3990.42,1843.92 h35
  text "26" at 4094.46,1843.92 h35
  text "25" at 4198.5,1843.92 h35
  text "CN3_7" at 4498.5,1808.92 h35
  text "CN2_2" at 2298.5,1803.92 h35
  text "CN2_1" at 2398.5,1708.92 h35
  text "CN3_8" at 4398.5,1703.92 h35
Bottom Overlay:
  text "1" at 2505.87,5209.04 h35 r45
  text "48" at 4456.13,5199.04 h35 r315
  text "2" at 2400.87,5114.04 h35 r45
  text "47" at 4566.13,5084.04 h35 r315
  text "3" at 2295.87,4999.04 h35 r45
  text "46" at 4671.13,4974.04 h35 r315
  text "4" at 2185.78,4893.68 h35 r81
  text "45" at 4791.13,4854.04 h35 r315
  text "5" at 2070.87,4779.04 h35 r45
  text "44" at 4891.13,4764.04 h35 r315
  text "6" at 1954.75,4673.01 h35 r40
  text "43" at 5001.13,4644.04 h35 r315
  text "48" at 4098.5,4589.57 h35
  text "1" at 2883.5,4588.05 h35
  text "7" at 1858.29,4556.91 h35 r34
  text "42" at 5111.13,4529.04 h35 r315
  text "47" at 4098.5,4489.35 h35
  text "2" at 2883.5,4488.27 h35
  text "8" at 1735.87,4444.04 h35 r45
  text "41" at 5226.13,4409.04 h35 r315
  text "46" at 4102.73,4389.66 h35 r14
  text "3" at 2883.5,4388.48 h35
  text "4" at 2893.79,4292.04 h35 r36
  text "45" at 4098.5,4288.92 h35
  text "5" at 2883.5,4188.92 h35
  text "44" at 4098.5,4188.7 h35
  text "40" at 5067.7,4188.92 h35
  text "1" at 1913.5,4183.92 h35
  text "6" at 2881.97,4089.2 h35 r355
  text "9" at 5084.12,4088.98 h35 r355
  text "43" at 4098.5,4088.48 h35
  text "48" at 1913.5,4083.92 h35
  text "7" at 2883.5,3989.35 h35
  text "42" at 4098.5,3988.27 h35
  text "2" at 1913.5,3983.92 h35
  text "39" at 5069.11,3983.93 h35 r2
  text "8" at 2883.5,3889.57 h35
  text "10" at 5075.65,3888.92 h35
  text "41" at 4098.5,3888.05 h35
  text "47" at 1913.5,3883.92 h35
  text "9" at 2881.97,3789.85 h35 r355
  text "40" at 4098.5,3787.83 h35
  text "3" at 1913.5,3783.92 h35
  text "38" at 5068.5,3783.92 h35
  text "11" at 5065.3,3706.42 h35 r270
  text "10" at 2883.5,3690.01 h35
  text "39" at 4099.11,3687.62 h35 r2
  text "46" at 1917.73,3684.44 h35 r14
  text "11" at 2866,3607.72 h35 r270
  text "4" at 1923.79,3587.26 h35 r36
  text "38" at 4098.5,3587.4 h35
  text "37" at 5068.5,3583.92 h35
  text "12" at 5075.65,3493.92 h35
  text "12" at 2883.5,3490.44 h35
  text "37" at 4098.5,3487.18 h35
  text "45" at 1913.5,3483.92 h35
  text "13" at 2883.5,3390.66 h35
  text "36" at 5069.11,3388.93 h35 r2
  text "36" at 4099.11,3386.97 h35 r2
  text "5" at 1913.5,3383.92 h35
  text "14" at 2883.5,3290.88 h35
  text "35" at 4098.5,3286.75 h35
  text "44" at 1913.5,3283.92 h35
  text "13" at 5075.65,3283.92 h35
  text "35" at 5068.5,3193.92 h35
  text "15" at 2883.5,3191.09 h35
  text "34" at 4098.5,3186.53 h35
  text "6" at 1911.97,3183.98 h35 r355
  text "16" at 2883.5,3091.31 h35
  text "14" at 5074.85,3088.92 h35
  text "33" at 4098.5,3086.31 h35
  text "43" at 1913.5,3083.92 h35
  text "17" at 2883.5,2991.53 h35
  text "34" at 5067.7,2988.92 h35
  text "7" at 1920.9,2985.56 h35 r25
  text "32" at 4098.5,2986.09 h35
  text "18" at 2883.5,2891.75 h35
  text "15" at 5075.65,2888.92 h35
  text "31" at 4098.5,2885.88 h35
  text "42" at 1913.5,2883.92 h35
  text "19" at 2870.09,2820.71 h35 r230
  text "30" at 4099.11,2785.67 h35 r2
  text "8" at 1913.5,2783.92 h35
  text "33" at 5068.5,2783.92 h35
  text "20" at 2893.29,2695.17 h35 r34
  text "29" at 4108.54,2688.6 h35 r35
  text "16" at 5076.45,2688.92 h35
  text "41" at 1913.5,2683.92 h35
  text "21" at 2883.5,2592.4 h35
  text "28" at 4098.5,2585.22 h35
  text "22" at 2883.5,2492.61 h35
  text "27" at 4098.5,2485.01 h35
  text "CN2_8" at 1813.5,2463.92 h35
  text "CN3_1" at 5258.5,2448.92 h35
  text "23" at 2883.5,2392.83 h35
  text "26" at 4098.5,2384.79 h35
  text "CN2_7" at 1923.5,2358.92 h35
  text "CN3_2" at 5168.5,2348.92 h35
  text "24" at 2883.5,2293.05 h35
  text "25" at 4098.5,2284.57 h35
  text "CN2_6" at 2018.5,2253.92 h35
  text "CN3_3" at 5078.5,2238.92 h35
  text "CN2_5" at 2138.5,2143.92 h35
  text "CN3_4" at 4963.5,2138.92 h35
  text "CN2_4" at 2243.5,2033.92 h35
  text "CN3_5" at 4848.5,2023.92 h35
  text "CN2_3" at 2343.5,1923.92 h35
  text "CN3_6" at 4753.5,1913.92 h35
  text "19" at 3242.59,1872.67 h35 r230
  text "20" at 3161.75,1846.91 h35 r34
  text "29" at 3847.38,1847.08 h35 r35
  text "24" at 2748.5,1843.92 h35
  text "23" at 2854.14,1843.92 h35
  text "22" at 2958.18,1843.92 h35
  text "21" at 3062.22,1843.92 h35
  text "18" at 3345.74,1843.92 h35
  text "17" at 3435.48,1843.92 h35
  text "32" at 3525.22,1843.92 h35
  text "31" at 3629.26,1843.92 h35
  text "30" at 3733.91,1843.93 h35 r2
  text "28" at 3941.38,1843.92 h35
  text "27" at 4045.42,1843.92 h35
  text "26" at 4149.46,1843.92 h35
  text "25" at 4253.5,1843.92 h35
  text "CN2_2" at 2463.5,1813.92 h35
  text "CN3_7" at 4643.5,1803.92 h35
  text "CN2_1" at 2563.5,1718.92 h35
  text "CN3_8" at 4543.5,1698.92 h35
Document:
  lines w0.1: 3472.5,3472.5 3474.5,3474.5